# Altium PCB SolarPanelPCB_FB_Rev5.8.PcbDoc
Units mm, origin at the board's own origin, x right, y up, seen from the top; angles counter-clockwise.
Board outline 82 x 198.5 mm, 2 copper layers (Top Layer, Bottom Layer), stack 0.56 mm thick; 16 components, 6 nets, 49 pads, 4 vias.
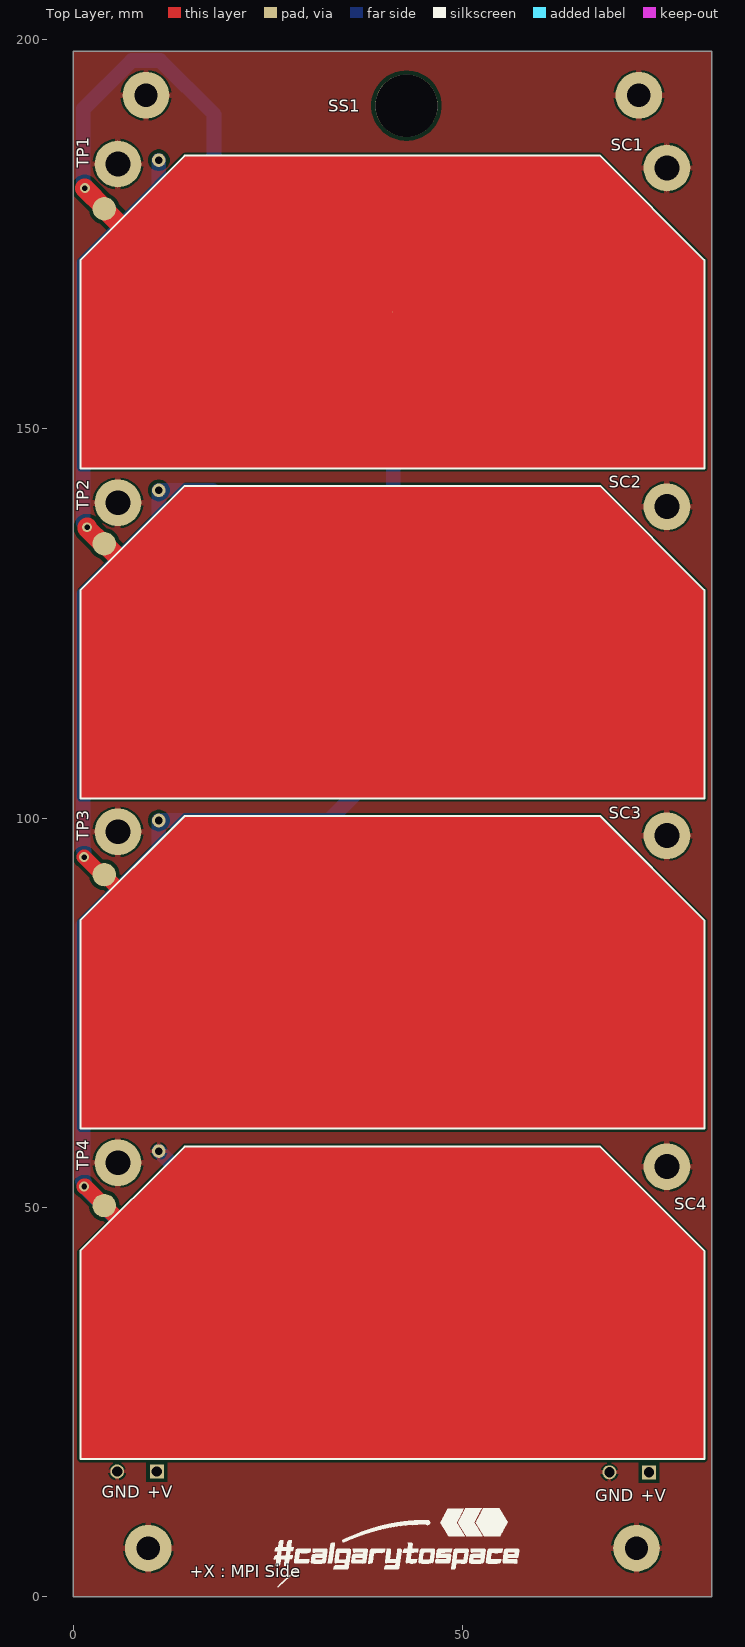
[diagram p0: Top Layer view]
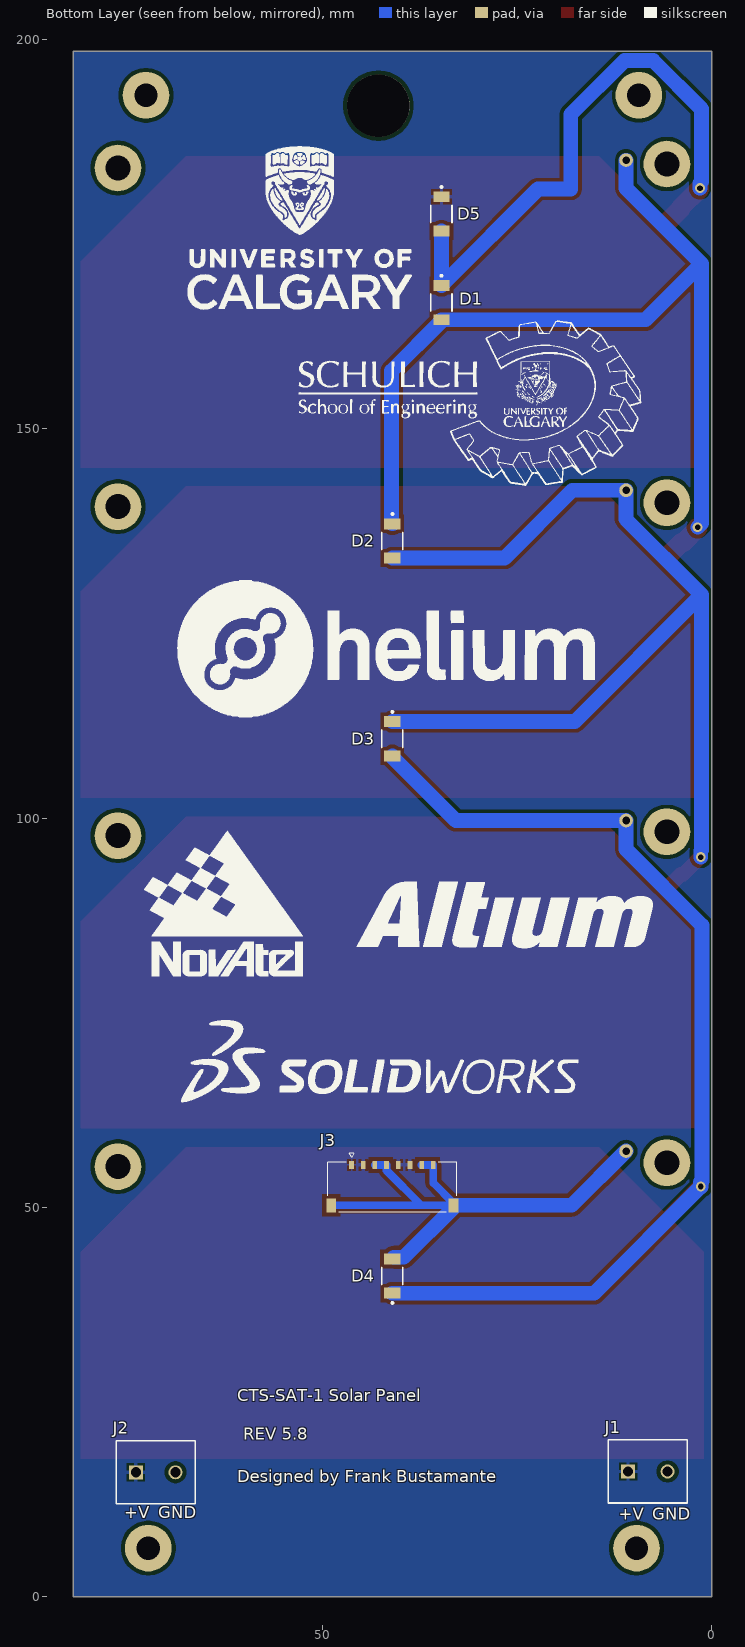
[diagram p1: Bottom Layer view, seen from below]
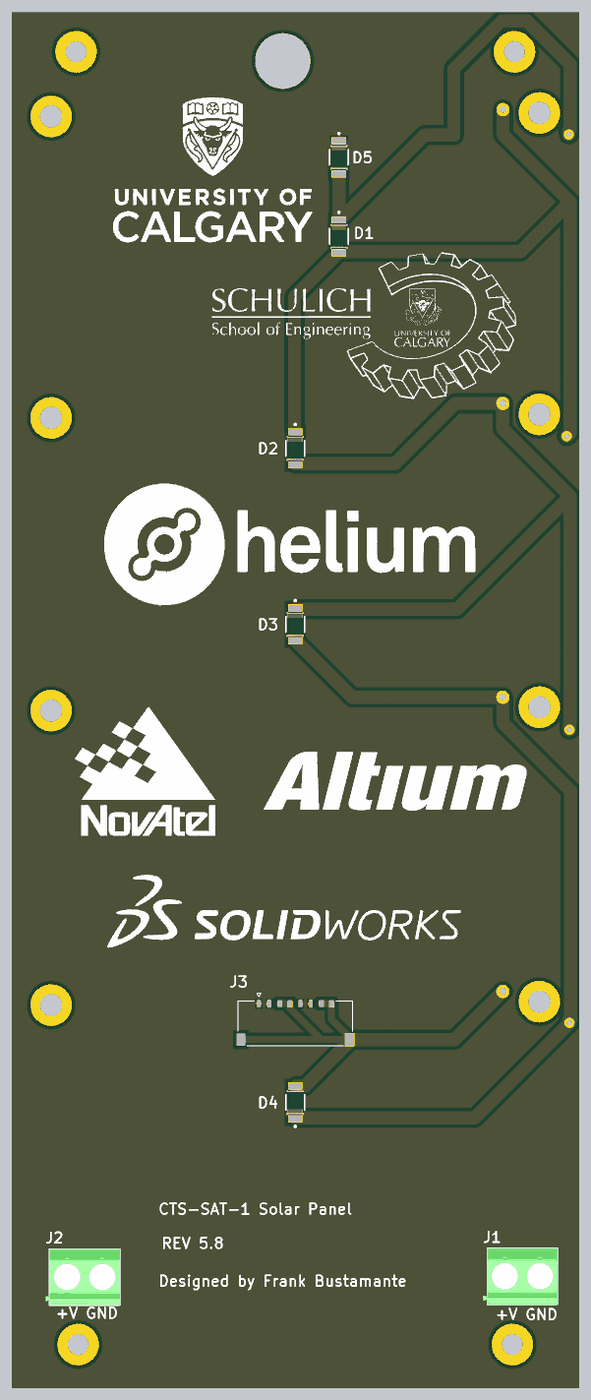
[diagram p2: 3D render of the assembled board from below, using the file's embedded part models]

## Layer stack, top to bottom
Top Solder: solder mask 0.0102, Solder Resist, Dk 3.5
Top Layer: signal copper 0.03
Dielectric 1: core 0.5, FR-4, Dk 4.5
Bottom Layer: signal copper 0.03
Bottom Solder: solder mask 0.0102, Solder Resist, Dk 3.5

## Board outline
0,0 82,0 82,198.5 0,198.5

## Design rules (kind name [scope] priority, off if disabled: settings)
Clearance [InNetClass('All Nets')] p1: gap=0.5 ignorepadtopadclearanceinfootprint=TRUE
HoleSize [All] p1: absolutevalues=TRUE maxlimit=4 minlimit=0.025 maxpercent=80.000 minpercent=20.000
PolygonConnect [All] p1: connectstyle=Relief reliefconductorwidth=0.254 reliefentries=4 polygonreliefangle="90 Angle" airgapwidth=0.254
RoutingVias [All] p1: holewidth=0.711 width=1.27 viastyle="Through Hole" minholewidth=0.711 minwidth=1.27 maxholewidth=0.711 maxwidth=1.27
SolderMaskExpansion [All] p1: expansion=0.102 istentingtop=FALSE
Width SolarPanel_route_widths [InNetClass('Standard_SolarPanel_PCB')] p1: maxlimit=6 minlimit=0.254 preferedwidth=2.5 checkconnectedcopper=TRUE
29 further rules are at their usual default settings.

## Classes and differential pairs
component class Gochermann_Solar_PanelRev3.4: D5 J1 J2 J3 SC1 SC2 SC3 SC4 TP1 TP2 TP3 TP4

## Components (designator, comment, footprint, x,y, rotation, side; value= is the part's Value field where it differs from the comment)
D1 "PMEG3050EP,115" FP-SOD128-MFG 34.7,166.2 r270 bottom
D2 "PMEG3050EP,115" FP-SOD128-MFG 41,135.6 r270 bottom
D3 "PMEG3050EP,115" FP-SOD128-MFG 41,110.2 r270 bottom
D4 "PMEG3050EP,115" FP-SOD128-MFG 41,41.2 r90 bottom
D5 "PMEG3050EP,115" FP-SOD128-MFG 34.7,177.6 r270 bottom
J1 "1729128" PHOE-1729128-2_V 8.2,16.1 r180 bottom
J2 "1729128" PHOE-1729128-2_V 71.4,16 r180 bottom
J3 "" MOLEX_5040500891 41,52.6 r0 bottom
SC1 "SOLAR CELL" SOL_CEL_GOCHERMANN 41,165 r0 top
SC2 "SOLAR CELL" SOL_CEL_GOCHERMANN 41,122.6 r0 top
SC3 "SOLAR CELL" SOL_CEL_GOCHERMANN 41,80.2 r0 top
SC4 "SOLAR CELL" SOL_CEL_GOCHERMANN 41,37.75 r0 top
TP1 "TP" TP#1 4,177.85 r270 top
TP2 "TP" TP#2 4.45,135.75 r270 top
TP3 "TP" TP#3 3.7,90.55 r90 top
TP4 "TP" TP#4 3.9,48.85 r90 top

## Footprints (in the part's own frame and the unit in brackets; to place one, negate y for a bottom-side part, rotate by r counter-clockwise, add the part's x,y. Pads: shape width x height; smd on the part's side, far side on the other; paste and mask are expansions set on the pad)
FP-SOD128-MFG [mm]
  rect 1.4x2.1 smd paste-1000 mask+0: 1(-2.2,0) 2(2.2,0)
  silkscreen extent -3.57,-1.35 1.12,1.35, body extent -2.35,-1.25 2.35,1.25, height 1.1
MOLEX_5040500891 [mm]
  rect 0.6x1 smd mask+0.076: 1(5.25,-2.87) 2(3.75,-2.87) 3(2.25,-2.87) 4(0.75,-2.87) 5(-0.75,-2.87) 6(-2.25,-2.87) 7(-3.75,-2.87) 8(-5.25,-2.87)
  rect 1.25x1.8 smd mask+0.076: S1(7.855,2.32) S2(-7.855,2.32)
  silkscreen extent -8.27,-4.37 8.27,3.22
PHOE-1729128-2_V [mm] "Receptacle, 2-Leads, Body 8.1x10.16mm, Pitch 5.08mm"
  rect 1.8x1.8 hole 1.3: 1(-2.54,0)
  round 1.8 hole 1.3: 2(2.54,0)
  silkscreen extent -5.08,-4.05 5.08,4.05, body extent -5.65,-4.05 5.08,4.05, height 10.01
SOL_CEL_GOCHERMANN [mm]
  round 1.75 hole 0.966: 6(-30,19.5)
  round 0.025 smd: +V_Cell(0,0)
  Top Layer region: -40,-20 -40,6.55 -26.55,20 26.55,20 40,6.55 40,-20
  silkscreen extent -40.07,-20.07 40.08,20.07
TP#1 [mm]
  round 3 smd: TP_3mm(-0.4,0)
TP#2 [mm]
  round 3 smd: TP_3mm(0.5,-0.45)
TP#3 [mm]
  round 3 smd: TP_3mm(2.2,-0.3)
TP#4 [mm]
  round 3 smd: TP_3mm(1.4,-0.1)

## Part data
D1 D2 D3 D4 D5: library part CMP-14398-000051-1, "DIODE SCHOTTKY 30V 5A SOD128", RoHS Compliant=Yes
J1 J2: library part CMP-2000-05815-1, "PCB Terminal Block, 13.5 A, 400 V, 2-Pin THD, RoHS, Bulk", Current Rating=13500mA, Manufacturer="Phoenix Contact", Package Description="2-Pin Through Hole Device, Body 8.1 x 10.16 mm, Pitch 5.08 mm", Package Reference=1729128-2, Package Version=03/2015, Voltage Rating=400V, Category="Terminal Blocks", ComponentLink1Description=https://datasheet.ciiva.com:443/pdfs/VipMasterIC/IC/PCON/PCON-S-A0008047989/PCON-S-A0008036843-1.pdf?src-supplier=IHS+Markit, ComponentLink1URL=https://datasheet.ciiva.com:443/pdfs/VipMasterIC/IC/PCON/PCON-S-A0008047989/PCON-S-A0008036843-1.pdf?src-supplier=IHS+Markit, ComponentLink2Description=https://datasheet.ciiva.com/16046/1729128-16046181.pdf?src-supplier=Onlinecomponents.com, ComponentLink2URL=https://datasheet.ciiva.com/16046/1729128-16046181.pdf?src-supplier=Onlinecomponents.com, ComponentLink3Description=https://datasheet.ciiva.com/15169/getdatasheetpartid-199310-15169845.pdf?src-supplier=Verical, ComponentLink3URL=https://datasheet.ciiva.com/15169/getdatasheetpartid-199310-15169845.pdf?src-supplier=Verical, ComponentLink4Description=https://datasheet.ciiva.com/823/1729128-823779.pdf?src-supplier=Digi-Key, ComponentLink4URL=https://datasheet.ciiva.com/823/1729128-823779.pdf?src-supplier=Digi-Key, ComponentLink5Description=https://datasheet.ciiva.com/14607/70054405-14607157.pdf?src-supplier=Allied+Electronics, ComponentLink5URL=https://datasheet.ciiva.com/14607/70054405-14607157.pdf?src-supplier=Allied+Electronics, ComponentLink6Description=https://datasheet.ciiva.com/29218/743664-da-01-en-printklemmenblock-mkdsn-1-5-2-5-08-29218154.pdf?src-supplier=Conrad, ComponentLink6URL=https://datasheet.ciiva.com/29218/743664-da-01-en-printklemmenblock-mkdsn-1-5-2-5-08-29218154.pdf?src-supplier=Conrad, Datasheet URL=https://datasheet.ciiva.com/16046/1729128-16046181.pdf, Datasheet Version=12/2013, Fastening Method=SCREW, Manufacturer Part Number=1729128, Manufacturer URL=http://www.phoenixcontact.com/, Mounting Technology=ThroughHole, No. of Positions=2, No. of Rows=1, Number of Decks=1, Number of Rows=1, Number of Ways=2, Orientation=Horizontal, Package URL=https://www.phoenixcontact.com/online/portal/pi/pxc/product_detail_page/!ut/p/b1/3VdJjqNKFDxLH8AFycySyWY2ozFsEPOMMQaDOX1XedGL_1Vdm5YXJleknhSKeBkvI6EA8ncAo3AYoDhBQGco6KN7VURTdemj9us_IEKEZo_YHiPAEWEFmDGOHMORkqKYCORBZxgL7ZoaZYcbFFUZ3fqxSY6GOuxydWUuHqz1ynmMFygu583Bob0Ewr6Sd_l-5m-kAueHiB0jpRwZwe58wwtkpxtMYd_LmGcDRU02dRNEyWt6Y2ti5pSyJ_reIkzIulrqApdnbT11V5jnCKbYNCvhEM1MCpPByat_X379-iThf08CI5GfOPqfBeS3BRoBOdD55AKVv0iLwCMq-2BrzXWSGRH7pUGD9uwXQjiph3xL0DKQwdGa0JImiIOmBNOestqgwTHSSs2oOep-78apyXQBvNi8ZLaFjvjWvcaUEBu0MC6Wbe-d6mB0FAebo2lUWinqYaZs5DAYzV0RP9yitUjnGJ0iI9xhZkT42OCQNUJJhkgWINNQLP2JFP6OpMg3JCVg70jqHT0lvKOnhHf0lPuOnnLf0VPuWx6_dxwUIvwk5WMkT0kLL1mh61l2yZVSzG3pYV_bqo-mj6uMKwKwdnnW8Jh5RTOJzMOA5c-eJDaZQw4mTMPH02PvS_ZAqNVjVTo2WyYLkwH_KU1mmmG5kjRhDqPXLwwVHvVOjCM60-fpXvTDfMGW1PVFVS1r4e4yVDk4ZdNbkUHvqPqQSeian4UD39fNKmachqdJ1NJbyk8rXT9mXTvPk3oE5meulKGgiruPJek-4I9hTT6G8ZLOyRSm2RRVbThERQad5OS28hdt4YW4vG0stgYYzsWsK4_7y6DZMjJSCqri1kyiZR5vD7pwIrNR7QwPHTcLTI5qT7eRlpHrdGiupYlqQDJ7zy_CND8fWWBoLRXxk1RVcXiBQwbTD4Xi7KL-FuO94t9xaqweXzH, Packing=Bulk, PartNumber=1729128, Pitch=5.08mm, Pricing 1="1=1.1123, 10=1.066, 50=1.0202, 100=0.993, 250=0.929, 500=0.8556, 1000=0.7754, 2500=0.7296 (USD)", Reach SVHC Compliant=No, RoHS=TRUE, RoHS Compliant=Yes, Safety Approval=CSA,CUL,CB,EAC, Stock 1=1412, Supplier 1="Arrow Electronics", Terminal and Terminal Block Type="BARRIER STRIP TERMINAL BLOCK", Wire Cross Section=1.5mm2, Wire/Cable Gauge=16AWG
J3: library part EPS_5040500891_Molex_Connector
SC1 SC2 SC3 SC4: library part SOL_CEL_Gochermann, "Solar Cell from Gochermann", InternalPart#=SC-3GA-3

## Free pads (board coordinates)
  round 6 hole 3.2: M3(5.75,55.75) M3(5.75,98.25) M3(5.75,140.5) M3(5.75,184) M3(76.25,55.25) M3(76.25,97.75) M3(76.25,140) M3(76.25,183.5)
  round 6 hole 3: M3(9.35,192.83) M3(9.65,6.26) M3(72.35,6.26) M3(72.65,192.83)
  round 8 hole 8: SS1(42.8,191.5)

## Via types
v1: diameter 1.27, hole 0.711, Top Layer to Bottom Layer, 4 vias

## Nets (pads, with @x,y where several pads share a name; then routed paths per layer and width w, separated by ;. In a path a pad name is that pad's centre, name@x,y a point inside that pad or via, vN(x,y) a via of type N, cw(c..) or ccw(c..) an arc to the next point about the centre after c; other vN are vias at no path point)
GND: D4.2 J1.2 J2.2 J3.3 J3.4 J3.7 J3.8 J3.S1 J3.S2 pad.M3 SC4.6 | length 67.9
  Bottom Layer w1: J3.S2@33.145,50.005 J3.S2 ; J3.7 J3.8 35.75,53.16 33.145,50.555 J3.S2 ; D4.2@40.8,43.6 D4.2 ; J3.3 J3.4 41.75,54.756 37.274,50.28 ; J3.S1 37.274,50.28 ; J3.S2 37.274,50.28
  Bottom Layer w1.9: SC4.6 17.97,50.28 J3.S2 ; J3.S2@33.145,50.005 39.55,43.6 D4.2@40.8,43.6
V_Panel: D5.1 J1.1 J2.1 J3.1 J3.2 J3.5 J3.6
V_SC1: D1.1 D5.2 SC1.+V_Cell TP1.TP_3mm | length 116.9
  Top Layer w2.5: v1(1.5,180.9) 1.5,180.885 4,178.385 TP1.TP_3mm 17.25,165 SC1.+V_Cell
  Bottom Layer w1.9: v1(1.5,180.9) 1.5,181.532 1.3,181.732 1.3,191.073 7.507,197.28 11.193,197.28 18.1,190.373 18.1,180.794 22.306,180.794 34.45,168.65 34.6,168.65 D1.1@34.7,168.55 ; D1.1 D1.1@34.7,168.55 ; D5.2 D1.1@34.7,168.55
V_SC2: D1.2 D2.1 SC1.6 SC2.+V_Cell TP2.TP_3mm | length 162
  Top Layer w2.5: v1(1.8,137.362) 1.8,137.232 3.687,135.346 3.904,135.346 TP2.TP_3mm 16.65,122.6 SC2.+V_Cell
  Bottom Layer w1.9: v1(1.8,137.362) 1.3,137.862 1.3,171.2 ; SC1.6 11,180.9 1.3,171.2 ; D2.1 41.1,137.9 41.1,157.45 34.7,163.85 D1.2 8.5,164 1.3,171.2
V_SC3: D2.2 D3.1 SC2.6 SC3.+V_Cell TP3.TP_3mm | length 177
  Top Layer w1.9: v1(1.4,95) 1.452,95 3.702,92.75 TP3.TP_3mm 16.55,80.2 SC3.+V_Cell
  Bottom Layer w1.9: v1(1.4,95) 1.4,95.807 1.3,95.907 1.3,128.69 ; D3.1 17.59,112.4 1.3,128.69 ; D2.2 26.6,133.4 17.9,142.1 SC2.6 11.017,142.083 11.017,138.407 1.3,128.69
V_SC4: D3.2 D4.1 SC3.6 SC4.+V_Cell TP4.TP_3mm | length 175.7
  Top Layer w2: v1(1.4,52.7) 1.55,52.7 TP4.TP_3mm 16.5,37.75 SC4.+V_Cell
  Bottom Layer w1.9: 1.25,53.386 1.25,86.25 11,96 SC3.6 32.85,99.7 41,107.85 D3.2 ; v1(1.4,52.7) 15.1,39 D4.1
  Bottom Layer w2: 1.25,53.386 1.4,53.236 v1(1.4,52.7)

## Polygon pours and split planes (outlines as drawn)
V_Panel on Bottom Layer "V_PANEL_L02_P000" (solid, pour order 0): 0,0 82,0 82,198.5 0,198.5
GND on Top Layer "GND_Polygon" (solid, pour order 1): 0,0 82,0 82,198.5 0,198.5

## Silkscreen, mask and mechanical layers (free items; w line width, h text height)
Top Overlay:
  drawing of 20 lines, arcs and shapes, not listed
  text "SS1" at 32.754,190.738 h1.52
  text "GND" at 3.669,12.729 h1.52
  text "+V" at 9.51,12.729 h1.52
  text "GND" at 67.029,12.304 h1.52
  text "+V" at 72.87,12.304 h1.52
  text "+X : MPI Side" at 15,2.5 h1.52
Bottom Overlay:
  drawing of 271 lines, arcs and shapes, not listed
  text "CTS-SAT-1 Solar Panel" at 60.919,25.104 h1.52
  text "REV 5.8" at 60.157,20.162 h1.52
  text "Designed by Frank Bustamante" at 60.919,14.712 h1.52
  text "GND" at 71.091,10.079 h1.52
  text "+V" at 75.41,10.079 h1.52
  text "+V" at 11.935,9.929 h1.52
  text "GND" at 7.616,9.879 h1.52